# EAGLE board USB B (EAGLE 6.3)
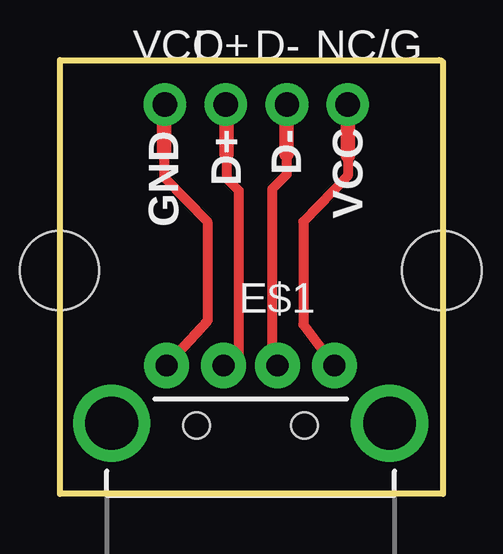
[diagram p0: board, top side]

Size 15.97 x 18.08 mm. Coordinates in mm from the lower left corner, seen from the top.
Outline: 0,0 0,18.08 15.82,18.08 15.9,18.05 15.97,18 15.97,0 0,0
Copper layers (1*16): Top 0.035mm / dielectric 1.5mm / Bottom 0.035mm
Design rules "default": minimum track width 8mil, minimum drill 20mil, track to track 8mil, track to pad 8mil, pad to pad 8mil, via to via 8mil, smd to smd 8mil, copper to edge 9mil, drill to drill 8mil, minimum pad ring 12mil, minimum via ring 10mil, stop-mask expansion 4mil, vias tented up to drill 20mil, thermal gap 10mil

## Footprints (pad centres in the part's own frame; a part is rotated, then mirrored left to right if it is on the bottom)
1X01-CLEANBIG = drill 1.016 pad 1.778: 1 0,0
USB-A-H = drill 0.914 pad 1.88: D+ 2.4,1.127; D- 2.4,-1.127; GND 2.4,3.5; VBUS 2.4,-3.5 | drill 2.2: GND2 0,-5.8; GND3 0,5.8 | hole 1.1: -0.1,2.25; -0.1,-2.25
STAND-OFF = hole 3.302: 0,0

## Placement (x,y rotation side)
D+  [1X01-CLEANBIG]  6.91,16.23 0 top
D-  [1X01-CLEANBIG]  9.47,16.23 0 top
E$1  [USB-A-H]  7.95,2.95 90 top
JP3  STAND-OFF  [STAND-OFF]  15.93,9.31 0 top
JP4  STAND-OFF  [STAND-OFF]  -0.02,9.31 0 top
NC/G  [1X01-CLEANBIG]  12,16.23 0 top
VCC  [1X01-CLEANBIG]  4.38,16.23 0 top

## Library data of the parts
D+ D- NC/G VCC = adafruit
E$1 JP3 JP4 = SparkFun

## Nets
S$1: E$1.VBUS NC/G.1
S$2: D-.1 E$1.D-
S$3: D+.1 E$1.D+
S$4: E$1.GND VCC.1

## Tracks (layer width: path | path; a pad name or v marks a point on that pad's centre or on a via)
S$1
  Top 0.406: 12,14.1 12,13.25 10.15,11.35 10.15,7.05 E$1.VBUS
  Top 0.61: NC/G.1 12,14.1
S$2
  Top 0.406: 9.45,14.15 9.45,13.3 8.85,12.7 8.85,5.78 E$1.D-
  Top 0.61: D-.1 9.45,16.23 9.45,14.15
S$3
  Top 0.406: 6.95,14.15 6.95,13.15 7.45,12.65 7.45,5.88 E$1.D+
  Top 0.61: D+.1 6.95,16.23 6.95,14.15
S$4
  Top 0.406: 4.35,14.15 4.35,13.2 6.15,11.35 6.15,7.2 E$1.GND
  Top 0.61: VCC.1 4.35,16.23 4.35,14.15

## Text on the board
_tsilk: GND | D+ | D- | VCC
_bsilk: quilix.com